# EAGLE board board (EAGLE 9.0.1)
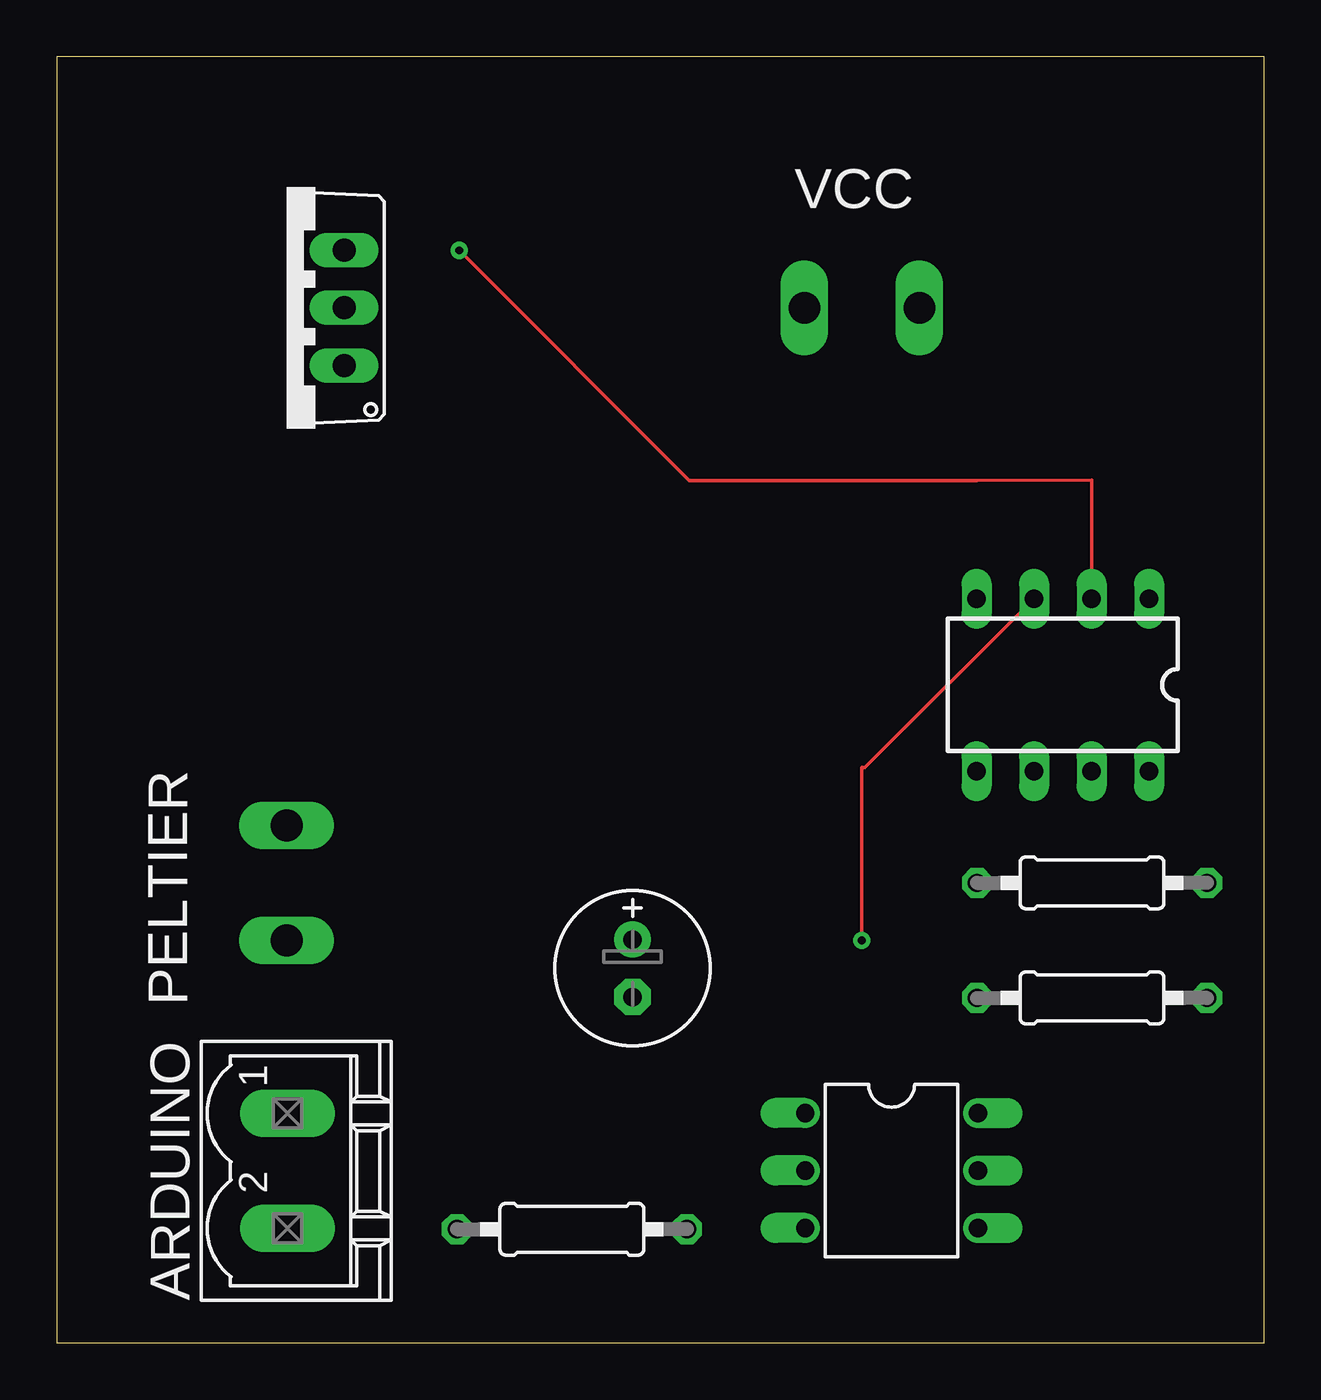
[diagram p0: board, top side]
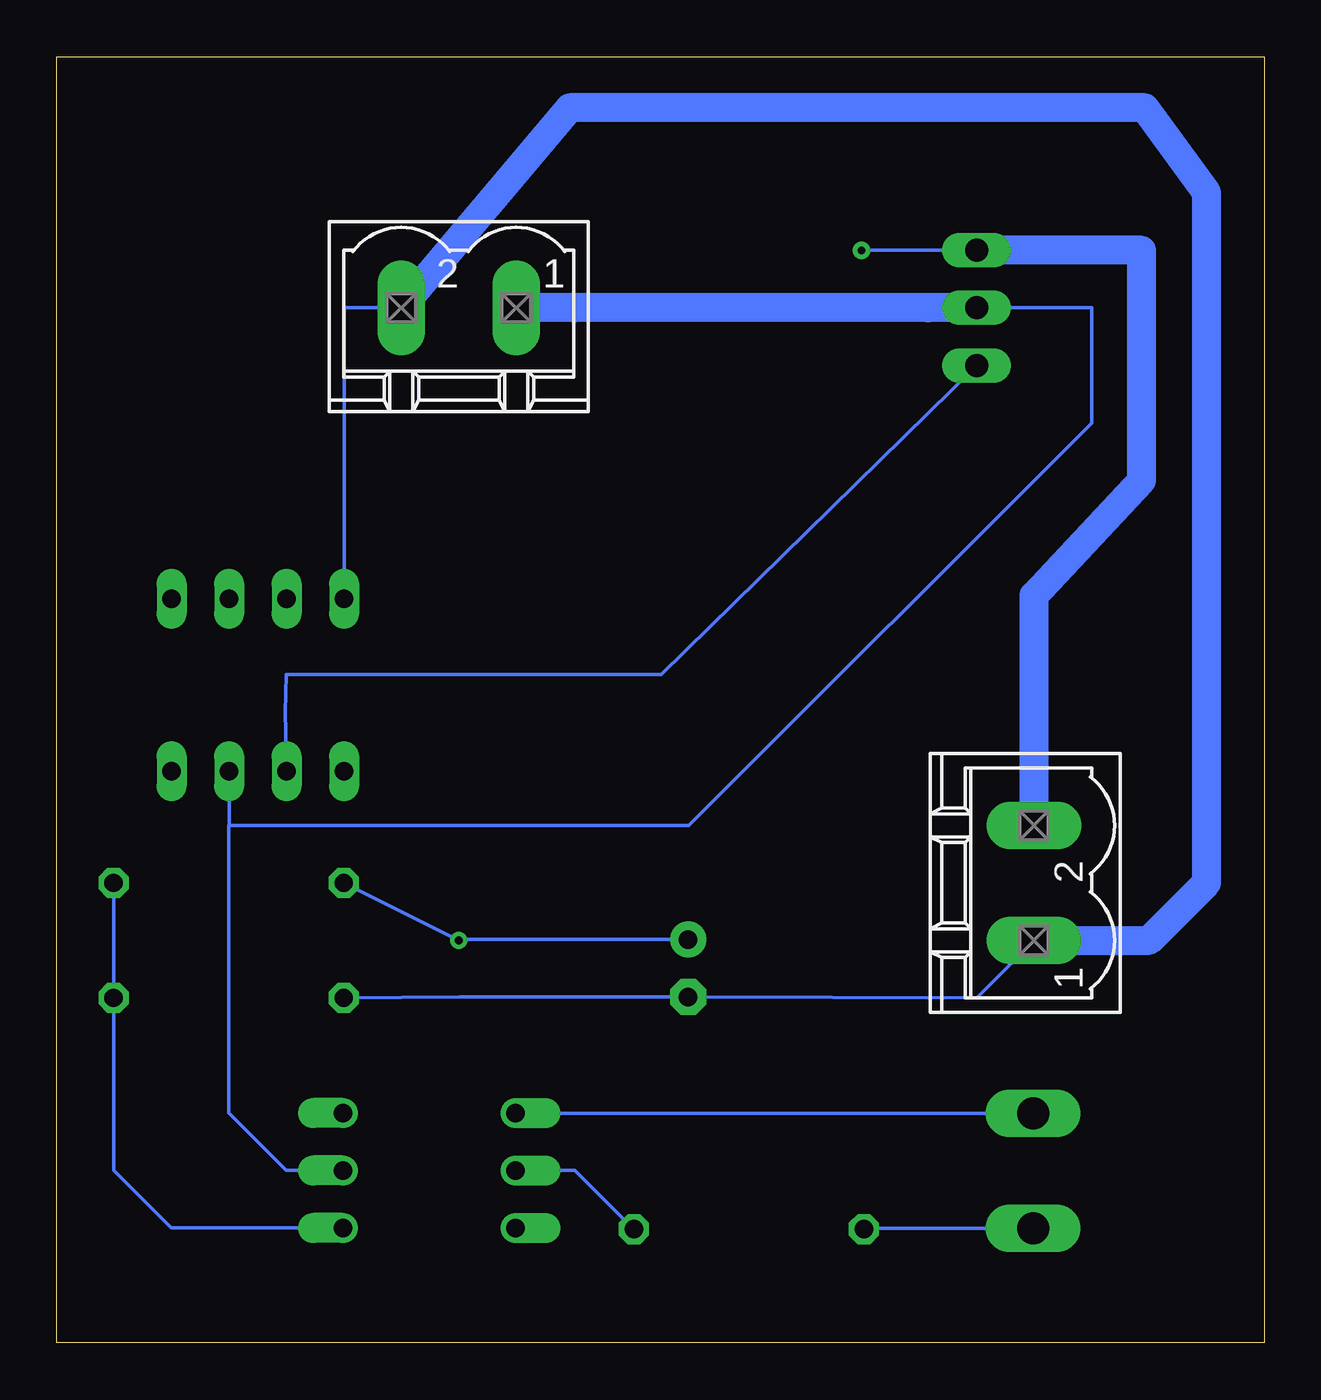
[diagram p1: board, bottom side, seen from below]

Size 53.32 x 56.82 mm. Coordinates in mm from the lower left corner, seen from the top.
Outline: 0,0 53.32,0 53.32,56.82 0,56.82 0,0
Copper layers (1*16): Top 0.035mm / dielectric 1.5mm / Bottom 0.035mm
Design rules "default": minimum track width 6mil, minimum drill 0.35mm, track to track 6mil, track to pad 6mil, pad to pad 6mil, via to via 6mil, smd to smd 6mil, copper to edge 40mil, drill to drill 6mil, minimum pad ring 10mil, minimum via ring 8mil, stop-mask expansion 4mil, vias tented up to drill 0mil, thermal gap 10mil

## Footprints (pad centres in the part's own frame; a part is rotated, then mirrored left to right if it is on the bottom)
MSTBV2 = drill 1.397 long: 1 -2.54,0; 2 2.54,0
E2,5-7 = drill 0.813 pad 1.6: + -1.27,0 | drill 0.813 pad 1.6 octagon: - 1.27,0
DIL06 = drill 0.813 offset: 1 -2.54,-3.81; 2 0,-3.81; 3 2.54,-3.81; 4 2.54,3.81; 5 0,3.81; 6 -2.54,3.81
TO220AV = drill 1.016 long: B -2.54,-2.54; C 0,-2.54; E 2.54,-2.54
0207/10 = drill 0.813 octagon: 1 -5.08,0; 2 5.08,0
DIL08 = drill 0.813 long: 1 -3.81,-3.81; 2 -1.27,-3.81; 3 1.27,-3.81; 4 3.81,-3.81; 5 3.81,3.81; 6 1.27,3.81; 7 -1.27,3.81; 8 -3.81,3.81

## Placement (x,y rotation side)
ARDUINO  MSTBV2  [MSTBV2]  10.2,7.6 270 top
C1  1u  [E2,5-7]  25.43,16.55 270 top
OK1  4N35  [DIL06]  36.87,7.62 270 top
PELTIER  MST2V  [MSTBV2]  10.16,20.32 90 bottom
Q1  TIP41C  [TO220AV]  10.16,45.72 90 top
R1  560R  [0207/10]  22.75,5.02 0 top
R2  1k  [0207/10]  45.72,15.24 0 top
R3  100k  [0207/10]  45.72,20.32 180 top
U1  TL081N  [DIL08]  44.43,29.07 180 top
VCC  MSTBV2  [MSTBV2]  35.56,45.72 180 bottom

## Library data of the parts
ARDUINO VCC = con-phoenix-508; MPN: MSTBV 2,5/2-GF-5.08; OC_FARNELL: 1792792; OC_NEWARK: 69R9845
C1 R1-R3 = resistor
OK1 = optocoupler; MF: FAIRCHILD SEMICONDUCTOR; MPN: 4N35; OC_FARNELL: 1328375; OC_NEWARK: 72K9946
PELTIER = con-phoenix-508; OC_FARNELL: unknown; OC_NEWARK: unknown
Q1 = transistor-power
U1 = op-amp

## Nets
GND: C1.- PELTIER.1 R2.1 U1.4 VCC.2
N$1: ARDUINO.2 R1.1
N$2: OK1.2 R1.2
N$3: ARDUINO.1 OK1.1
N$4: OK1.4 R2.2 R3.1
N$5: C1.+ R3.2 U1.3
N$6: Q1.B U1.6
N$7: PELTIER.2 Q1.E U1.2
VCC: OK1.5 Q1.C U1.7 VCC.1

## Tracks (layer width: path | path; a pad name or v marks a point on that pad's centre or on a via)
GND
  Bottom 0.152: PELTIER.1 12.69,15.24 C1.- 35.52,15.28 R2.1 | U1.4 40.62,45.73 VCC.2
  Bottom 1.27: PELTIER.1 5.08,17.78 2.54,20.32 2.54,50.8 5.27,54.56 30.67,54.56 VCC.2
N$1
  Bottom 0.152: ARDUINO.2 17.63,5.06 R1.1
N$2
  Bottom 0.152: R1.2 30.43,7.62 OK1.2
N$3
  Bottom 0.152: 12.14,10.16 ARDUINO.1 33.04,10.14 OK1.1
N$4
  Bottom 0.152: R3.1 R2.2 50.8,7.62 48.26,5.08 OK1.4
N$5  (via drill 0.35)
  Top 0.152: U1.3 35.67,25.43 35.55,25.43 v35.56,17.78
  Bottom 0.152: C1.+ 30.48,17.82 | 30.48,17.82 30.52,17.82 | R3.2 v35.56,17.78 35.52,17.82 30.48,17.82
N$6
  Bottom 0.152: U1.6 43.22,27.86 43.19,29.52 26.61,29.52 Q1.B
N$7  (via drill 0.35)
  Top 0.152: U1.2 45.7,38.12 40.64,38.1 27.94,38.1 v17.78,48.26
  Bottom 0.152: Q1.E v17.78,48.26
  Bottom 1.27: PELTIER.2 10.16,33.02 5.4,38.1 5.4,48.26 Q1.E
VCC
  Bottom 0.152: OK1.5 43.18,7.62 45.72,10.16 45.72,22.86 | Q1.C 7.62,45.72 7.62,40.64 25.4,22.86 45.72,22.86 | 45.72,22.86 45.7,22.88 U1.7
  Bottom 1.27: Q1.C 14.85,45.72 30.48,45.72 VCC.1